# EAGLE board openSX70_XXXXX_8_20190606B (EAGLE 9.3.2)

Size 95.88 x 27.86 mm. Coordinates in mm from the lower left corner, seen from the top.
Outline: 71.72,15.54 71.88,15.53 72.03,15.48 72.17,15.41 72.29,15.31 72.39,15.19 72.46,15.06 72.51,14.91 72.52,14.74
Outline: 72.52,14.74 72.51,14.58 72.46,14.43 72.39,14.3 72.29,14.18
Outline: 72.29,14.18 72.17,14.08 72.03,14.01 71.88,13.96 71.72,13.94
Outline: 71.72,13.94 71.56,13.96 71.41,14.01 71.28,14.08 71.16,14.18
Outline: 71.16,14.18 71.06,14.3 70.99,14.43 70.94,14.58 70.92,14.74
Outline: 70.92,14.74 70.94,14.91 70.99,15.06 71.06,15.19 71.16,15.31 71.28,15.41 71.41,15.48 71.56,15.53 71.72,15.54
Outline: 71.72,15.54 71.57,15.53 71.42,15.48 71.28,15.41 71.16,15.31 71.06,15.19 70.98,15.05 70.94,14.9 70.92,14.74
Outline: 70.92,14.74 70.94,14.59 70.98,14.44 71.06,14.3 71.16,14.18
Outline: 71.16,14.18 71.28,14.08 71.42,14.01 71.57,13.96 71.72,13.94
Outline: 71.72,13.94 71.88,13.96 72.03,14.01 72.17,14.08 72.29,14.18
Outline: 72.29,14.18 72.39,14.3 72.46,14.44 72.51,14.59 72.52,14.74
Outline: 72.52,14.74 72.51,14.9 72.46,15.05 72.39,15.19 72.29,15.31 72.17,15.41 72.03,15.48 71.88,15.53 71.72,15.54
Outline: 91.7,22.11 91.77,22.11 95.88,22.11 95.88,5.64 84.4,5.64 84.15,5.6 83.83,5.47 83.48,5.27 83.11,5.01 82.78,4.68 82.5,4.3 82.31,3.87 82.24,3.4 82.24,2.41 68.47,2.41 68.47,0 4.17,0 4.17,3.6 4.11,3.9 3.94,4.23 3.69,4.56 3.36,4.89 2.98,5.18 2.56,5.42 2.11,5.58 1.66,5.64 0,5.64 0,13.82 2.59,13.84 2.81,13.96 2.98,14.15 3.07,14.39 3.1,14.65 3.07,14.91 2.97,15.15 2.81,15.34 2.59,15.45 0,15.46 0,19.29 2.59,19.29 3.14,19.36 3.6,19.56 3.99,19.87 4.3,20.26 4.53,20.7 4.7,21.17 4.79,21.65 4.82,22.11 4.82,27.07 15.1,27.07 15.1,25.94 25.09,25.95 25.09,27.81 27.43,27.82 31.39,27.82 71.71,27.86 72.52,27.07 89.55,27.07 89.55,24.21 89.61,23.9 89.76,23.56 89.97,23.21 90.25,22.87 90.57,22.57 90.93,22.33 91.31,22.17 91.7,22.11
Outline: 83.76,20.77 83.76,22.06 83.77,22.12 83.79,22.19 83.82,22.24 83.86,22.29 83.91,22.33 83.96,22.36 84.03,22.38 84.09,22.39 84.57,22.39 84.64,22.38 84.7,22.36 84.76,22.33 84.81,22.29 84.85,22.24 84.88,22.19 84.9,22.12 84.9,22.06 84.9,20.77 84.9,20.7 84.88,20.64 84.85,20.58 84.81,20.53 84.76,20.49 84.7,20.46 84.64,20.44 84.57,20.44 84.09,20.44 84.03,20.44 83.96,20.46 83.91,20.49 83.86,20.53 83.82,20.58 83.79,20.64 83.77,20.7 83.76,20.77
Outline: 87.19,20.53 88.48,20.53 88.54,20.52 88.61,20.5 88.66,20.47 88.71,20.43 88.75,20.38 88.78,20.32 88.8,20.26 88.81,20.19 88.81,19.71 88.8,19.65 88.78,19.59 88.75,19.53 88.71,19.48 88.66,19.44 88.61,19.41 88.54,19.39 88.48,19.38 87.19,19.38 87.12,19.39 87.06,19.41 87,19.44 86.95,19.48 86.91,19.53 86.88,19.59 86.86,19.65 86.86,19.71 86.86,20.19 86.86,20.26 86.88,20.32 86.91,20.38 86.95,20.43 87,20.47 87.06,20.5 87.12,20.52 87.19,20.53
Outline: 91.84,20.53 93.13,20.53 93.2,20.52 93.26,20.5 93.32,20.47 93.37,20.43 93.41,20.38 93.44,20.32 93.46,20.26 93.46,20.19 93.46,19.71 93.46,19.65 93.44,19.59 93.41,19.53 93.37,19.48 93.32,19.44 93.26,19.41 93.2,19.39 93.13,19.38 91.84,19.38 91.78,19.39 91.71,19.41 91.66,19.44 91.61,19.48 91.57,19.53 91.54,19.59 91.52,19.65 91.51,19.71 91.51,20.19 91.52,20.26 91.54,20.32 91.57,20.38 91.61,20.43 91.66,20.47 91.71,20.5 91.78,20.52 91.84,20.53
Outline: 78.36,25.71 79.65,25.71 79.71,25.7 79.78,25.68 79.83,25.65 79.88,25.61 79.92,25.56 79.95,25.5 79.97,25.44 79.98,25.37 79.98,24.9 79.97,24.83 79.95,24.77 79.92,24.71 79.88,24.66 79.83,24.62 79.78,24.59 79.71,24.57 79.65,24.56 78.36,24.56 78.29,24.57 78.23,24.59 78.17,24.62 78.12,24.66 78.08,24.71 78.05,24.77 78.03,24.83 78.02,24.9 78.02,25.37 78.03,25.44 78.05,25.5 78.08,25.56 78.12,25.61 78.17,25.65 78.23,25.68 78.29,25.7 78.36,25.71
Outline: 68.87,25.84 70.16,25.84 70.23,25.83 70.29,25.81 70.35,25.78 70.39,25.74 70.44,25.69 70.47,25.63 70.49,25.57 70.49,25.51 70.49,25.03 70.49,24.96 70.47,24.9 70.44,24.84 70.39,24.79 70.35,24.75 70.29,24.72 70.23,24.7 70.16,24.69 68.87,24.69 68.8,24.7 68.74,24.72 68.68,24.75 68.64,24.79 68.59,24.84 68.56,24.9 68.54,24.96 68.54,25.03 68.54,25.51 68.54,25.57 68.56,25.63 68.59,25.69 68.64,25.74 68.68,25.78 68.74,25.81 68.8,25.83 68.87,25.84
Outline: 64.95,25.84 66.24,25.84 66.31,25.83 66.37,25.81 66.43,25.78 66.48,25.74 66.52,25.69 66.55,25.63 66.57,25.57 66.57,25.51 66.57,25.03 66.57,24.96 66.55,24.9 66.52,24.84 66.48,24.79 66.43,24.75 66.37,24.72 66.31,24.7 66.24,24.69 64.95,24.69 64.88,24.7 64.82,24.72 64.77,24.75 64.72,24.79 64.68,24.84 64.65,24.9 64.63,24.96 64.62,25.03 64.62,25.51 64.63,25.57 64.65,25.63 64.68,25.69 64.72,25.74 64.77,25.78 64.82,25.81 64.88,25.83 64.95,25.84
Outline: 31.52,16.35 41.5,22.53 42.01,22.82 42.74,23.03 43.62,23.16 44.59,23.21 45.57,23.18 46.5,23.05 47.32,22.84 47.95,22.53 58.05,16.23 58.41,15.9 58.64,15.51 58.76,15.07 58.78,14.61 58.71,14.16 58.56,13.73 58.34,13.34 58.06,13.03 49.78,7.77 48.71,7.05 47.57,6.51 46.38,6.16 45.13,5.99 43.84,6.03 42.53,6.28 41.2,6.75 39.87,7.45 31.22,12.93 30.83,13.23 30.55,13.62 30.37,14.06 30.32,14.55 30.4,15.04 30.62,15.52 30.99,15.97 31.52,16.35
Outline: 78.39,25.69 79.68,25.69 79.75,25.69 79.81,25.67 79.87,25.64 79.92,25.59 79.96,25.55 79.99,25.49 80.01,25.43 80.02,25.36 80.02,24.88 80.01,24.81 79.99,24.75 79.96,24.7 79.92,24.65 79.87,24.61 79.81,24.58 79.75,24.56 79.68,24.55 78.39,24.55 78.33,24.56 78.27,24.58 78.21,24.61 78.16,24.65 78.12,24.7 78.09,24.75 78.07,24.81 78.06,24.88 78.06,25.36 78.07,25.43 78.09,25.49 78.12,25.55 78.16,25.59 78.21,25.64 78.27,25.67 78.33,25.69 78.39,25.69
Outline: 83.8,20.75 83.8,22.04 83.8,22.11 83.82,22.17 83.85,22.23 83.9,22.28 83.94,22.32 84,22.35 84.06,22.37 84.13,22.38 84.61,22.38 84.68,22.37 84.74,22.35 84.79,22.32 84.84,22.28 84.88,22.23 84.91,22.17 84.93,22.11 84.94,22.04 84.94,20.75 84.93,20.69 84.91,20.62 84.88,20.57 84.84,20.52 84.79,20.48 84.74,20.45 84.68,20.43 84.61,20.42 84.13,20.42 84.06,20.43 84,20.45 83.94,20.48 83.9,20.52 83.85,20.57 83.82,20.62 83.8,20.69 83.8,20.75
Outline: 64.99,25.82 66.28,25.82 66.35,25.82 66.41,25.8 66.46,25.77 66.51,25.73 66.55,25.68 66.58,25.62 66.6,25.56 66.61,25.49 66.61,25.01 66.6,24.95 66.58,24.88 66.55,24.83 66.51,24.78 66.46,24.74 66.41,24.71 66.35,24.69 66.28,24.68 64.99,24.68 64.92,24.69 64.86,24.71 64.8,24.74 64.75,24.78 64.71,24.83 64.68,24.88 64.66,24.95 64.66,25.01 64.66,25.49 64.66,25.56 64.68,25.62 64.71,25.68 64.75,25.73 64.8,25.77 64.86,25.8 64.92,25.82 64.99,25.82
Outline: 68.91,25.82 70.2,25.82 70.26,25.82 70.33,25.8 70.38,25.77 70.43,25.73 70.47,25.68 70.5,25.62 70.52,25.56 70.53,25.49 70.53,25.01 70.52,24.95 70.5,24.88 70.47,24.83 70.43,24.78 70.38,24.74 70.33,24.71 70.26,24.69 70.2,24.68 68.91,24.68 68.84,24.69 68.78,24.71 68.72,24.74 68.67,24.78 68.63,24.83 68.6,24.88 68.58,24.95 68.58,25.01 68.58,25.49 68.58,25.56 68.6,25.62 68.63,25.68 68.67,25.73 68.72,25.77 68.78,25.8 68.84,25.82 68.91,25.82
Outline: 87.23,20.51 88.52,20.51 88.58,20.5 88.64,20.49 88.7,20.45 88.75,20.41 88.79,20.36 88.82,20.31 88.84,20.25 88.85,20.18 88.85,19.7 88.84,19.63 88.82,19.57 88.79,19.51 88.75,19.47 88.7,19.43 88.64,19.39 88.58,19.37 88.52,19.37 87.23,19.37 87.16,19.37 87.1,19.39 87.04,19.43 86.99,19.47 86.95,19.51 86.92,19.57 86.9,19.63 86.89,19.7 86.89,20.18 86.9,20.25 86.92,20.31 86.95,20.36 86.99,20.41 87.04,20.45 87.1,20.49 87.16,20.5 87.23,20.51
Outline: 91.88,20.51 93.17,20.51 93.24,20.5 93.3,20.49 93.36,20.45 93.4,20.41 93.44,20.36 93.48,20.31 93.5,20.25 93.5,20.18 93.5,19.7 93.5,19.63 93.48,19.57 93.44,19.51 93.4,19.47 93.36,19.43 93.3,19.39 93.24,19.37 93.17,19.37 91.88,19.37 91.81,19.37 91.75,19.39 91.69,19.43 91.65,19.47 91.6,19.51 91.57,19.57 91.55,19.63 91.55,19.7 91.55,20.18 91.55,20.25 91.57,20.31 91.6,20.36 91.65,20.41 91.69,20.45 91.75,20.49 91.81,20.5 91.88,20.51
Outline: 89.58,21.32 90.87,21.32 90.94,21.31 91,21.29 91.05,21.26 91.1,21.22 91.14,21.17 91.18,21.12 91.19,21.05 91.2,20.99 91.2,20.51 91.19,20.44 91.18,20.38 91.14,20.32 91.1,20.27 91.05,20.23 91,20.2 90.94,20.18 90.87,20.18 89.58,20.18 89.51,20.18 89.45,20.2 89.39,20.23 89.35,20.27 89.3,20.32 89.27,20.38 89.25,20.44 89.25,20.51 89.25,20.99 89.25,21.05 89.27,21.12 89.3,21.17 89.35,21.22 89.39,21.26 89.45,21.29 89.51,21.31 89.58,21.32
Outline: 31.56,16.33 41.53,22.52 42.05,22.81 42.78,23.02 43.66,23.15 44.62,23.2 45.61,23.16 46.54,23.04 47.36,22.83 47.99,22.52 58.09,16.22 58.45,15.89 58.68,15.49 58.8,15.06 58.82,14.6 58.75,14.14 58.6,13.71 58.38,13.33 58.1,13.01 49.82,7.75 48.75,7.04 47.61,6.5 46.41,6.14 45.17,5.98 43.88,6.02 42.57,6.27 41.24,6.74 39.91,7.43 31.26,12.92 30.87,13.22 30.58,13.6 30.41,14.05 30.36,14.53 30.44,15.03 30.66,15.51 31.03,15.95 31.56,16.33
Copper layers (1*16): Top 0.035mm / dielectric 1.5mm / Bottom 0.035mm
Design rules "default": minimum track width 6mil, minimum drill 0.35mm, track to track 6mil, track to pad 6mil, pad to pad 6mil, via to via 6mil, smd to smd 6mil, copper to edge 40mil, drill to drill 6mil, minimum pad ring 10mil, minimum via ring 8mil, stop-mask expansion 4mil, vias tented up to drill 0mil, thermal gap 10mil
Net classes: 0 default: width 0.254 mm; 1 GND: width 0.61 mm

## Footprints (pad centres in the part's own frame; a part is rotated, then mirrored left to right if it is on the bottom)
C0603 = smd 0.889 x 0.889: 1 0,0.762; 2 0,-0.762
SODFL2512X100N = smd 1.05 x 0.6: A 1.4,0; C -1.4,0
H2X3-2.54 = drill 0.635 pad 1.397 square: 1 -1.27,2.54 | drill 0.635 pad 1.397: 2 -1.27,0; 3 -1.27,-2.54; 4 1.27,-2.54; 5 1.27,0; 6 1.27,2.54
687106183722 = smd 0.3 x 1: 1 -1.25,1.9; 2 -0.75,1.9; 3 -0.25,1.9; 4 0.25,1.9; 5 0.75,1.9; 6 1.25,1.9 | smd 1.65 x 1.3: Z1 -3.525,0; Z2 3.525,0
SOT23-3 = smd 0.8 x 0.9: 1 -0.95,-1; 2 0.95,-1; 3 0,1.1
R0603 = smd 0.889 x 0.889: 1 0,0.762; 2 0,-0.762
SMT-JUMPER_3_1-NC_TRACE_SILK = smd 0.635 x 1.27: 1 -1.016,0; 2 0,0; 3 1.016,0
SX70-S-PAD2 = smd 2.413 x 1.143: P$1 0.01,0.087
SX70-SOLENOID1-2 = smd 1.372 x 2.54: SOL1+ -0.826,0.127; SOL1- 0.953,0.127
SOIC8 = smd 2.2 x 0.6: 1 -2.6,1.905; 2 -2.6,0.635; 3 -2.6,-0.635; 4 -2.6,-1.905; 5 2.6,-1.905; 6 2.6,-0.635; 7 2.6,0.635; 8 2.6,1.905
PAD.03X.04 = smd 1.016 x 1.016: P$1 0,0
MLF32 = smd 0.7 x 0.3: 1 -2.35,1.75; 2 -2.35,1.25; 3 -2.35,0.75; 4 -2.35,0.25; 5 -2.35,-0.25; 6 -2.35,-0.75; 7 -2.35,-1.25; 8 -2.35,-1.75; 17 2.35,-1.75; 18 2.35,-1.25; 19 2.35,-0.75; 20 2.35,-0.25; 21 2.35,0.25; 22 2.35,0.75; 23 2.35,1.25; 24 2.35,1.75 | smd 0.3 x 0.7: 9 -1.75,-2.35; 10 -1.25,-2.35; 11 -0.75,-2.35; 12 -0.25,-2.35; 13 0.25,-2.35; 14 0.75,-2.35; 15 1.25,-2.35; 16 1.75,-2.35; 25 1.75,2.35; 26 1.25,2.35; 27 0.75,2.35; 28 0.25,2.35; 29 -0.25,2.35; 30 -0.75,2.35; 31 -1.25,2.35; 32 -1.75,2.35
SOT127P706X180-6N = smd 0.92 x 1.61: 1 -2.54,-3.005; 2 -1.27,-3.005; 3 0,-3.005; 4 1.27,-3.005; 5 2.54,-3.005 | smd 3.16 x 1.97: 6 0,3.005
SX70-7-PAD-PROPER = smd 1.31 x 2.159: GND 7.875,1.312; MOTOR 6.125,1.312; S3 9.625,1.312; S5 11.375,1.312; S8 0.875,1.312; S9 2.625,1.312; VCC 4.375,1.312
FFA-PAD-PACKAGE = smd 1.95 x 1.95: F+ -3.277,-0.013; F- 2.87,0 | smd 1.05 x 1.95: FF -0.914,0; FT 0.737,0.025
LTST-BILED-15X16 = smd 0.65 x 0.952: P$1 0.425,0.776; P$2 -0.425,0.776; P$3 0.425,-0.776; P$4 -0.425,-0.776
CFP95P160X100-3N = smd 0.3 x 2.032: GND 0.038,0.175; IN -0.912,0.177; OUT 0.992,0.174

## Placement (x,y rotation side)
C1  1uf  [C0603]  -0.28,-18.84 0 top  (outside the outline)
C2  10nf  [C0603]  -5.36,-18.84 0 top  (outside the outline)
C3  100nf  [C0603]  -10.44,-18.84 0 top  (outside the outline)
C4  1uf  [C0603]  25.12,-13.76 0 top  (outside the outline)
C5  100nf  [C0603]  20.04,-13.76 0 top  (outside the outline)
C6  100nf  [C0603]  14.96,-13.76 0 top  (outside the outline)
C7  100nf  [C0603]  9.88,-13.76 0 top  (outside the outline)
C8  100nf  [C0603]  4.8,-13.76 0 top  (outside the outline)
C9  100nf  [C0603]  -0.28,-13.76 0 top  (outside the outline)
D1  1N4148WSF  [SODFL2512X100N]  12.42,-22.65 0 top  (outside the outline)
D2  1N4148WSF  [SODFL2512X100N]  4.8,-22.65 0 top  (outside the outline)
ICSP  ICSP  [H2X3-2.54]  11.15,-37.89 0 top  (outside the outline)
J1  687106183722  [687106183722]  8.61,-58.21 0 top  (outside the outline)
Q1  5.8A/30V/35mΩ  [SOT23-3]  3.53,-37.89 0 top  (outside the outline)
Q2  5.8A/30V/35mΩ  [SOT23-3]  -1.55,-37.89 0 top  (outside the outline)
R1  100R  [R0603]  -7.9,-22.65 0 top  (outside the outline)
R2  100K 1/10W  [R0603]  -6.63,-39.16 0 top  (outside the outline)
R3  100R  [R0603]  25.12,-17.57 0 top  (outside the outline)
R4  100K 1/10W  [R0603]  25.12,-29 0 top  (outside the outline)
R5  15K 1/10W  [R0603]  6.07,-29 0 top  (outside the outline)
R6  10K  [R0603]  20.04,-17.57 0 top  (outside the outline)
R7  100R  [R0603]  14.96,-17.57 0 top  (outside the outline)
R9  15K 1/10W  [R0603]  0.99,-29 0 top  (outside the outline)
R10  10K  [R0603]  9.88,-17.57 0 top  (outside the outline)
R11  1K 1/10W  [R0603]  -4.09,-29 0 top  (outside the outline)
R12  10K  [R0603]  4.8,-17.57 0 top  (outside the outline)
S0  S0  [SMT-JUMPER_3_1-NC_TRACE_SILK]  -0.28,-22.65 0 top  (outside the outline)
S1+  SX70-S-PAD-NEW  [SX70-S-PAD2]  16.23,-9.95 0 top  (outside the outline)
S1-  SX70-S-PAD-NEW  [SX70-S-PAD2]  12.42,-9.95 0 top  (outside the outline)
S2  S2  [SMT-JUMPER_3_1-NC_TRACE_SILK]  -4.09,-22.65 0 top  (outside the outline)
S2+  SX70-S-PAD-NEW  [SX70-S-PAD2]  8.61,-9.95 0 top  (outside the outline)
S2-  SX70-S-PAD-NEW  [SX70-S-PAD2]  4.8,-9.95 0 top  (outside the outline)
SOL1  SX70-SOLENOID1-2PADS  [SX70-SOLENOID1-2]  -5.36,-13.76 0 top  (outside the outline)
SOL2+  SX70-S-PAD-NEW  [SX70-S-PAD2]  0.99,-9.95 0 top  (outside the outline)
SOL2-  SX70-S-PAD-NEW  [SX70-S-PAD2]  -2.82,-9.95 0 top  (outside the outline)
TCS3200  TCS3200D  [SOIC8]  20.04,-36.62 0 top  (outside the outline)
TP1  TEST-POINT3X4  [PAD.03X.04]  -5.36,-9.95 0 top  (outside the outline)
TP2  TEST-POINT3X4  [PAD.03X.04]  -7.9,-9.95 0 top  (outside the outline)
TP3  TEST-POINT3X4  [PAD.03X.04]  -10.44,-9.95 0 top  (outside the outline)
TP4  TEST-POINT3X4  [PAD.03X.04]  26.39,-7.41 0 top  (outside the outline)
U1  ATMEGA328P_32MLFATMEGA328-MLF  [MLF32]  -4.09,-46.78 0 top  (outside the outline)
U2  TPS79501DCQ  [SOT127P706X180-6N]  23.85,-56.94 0 top  (outside the outline)
U$1  SX70-7-PAD  [SX70-7-PAD-PROPER]  9.88,-27.73 0 top  (outside the outline)
U$2  FFA  [FFA-PAD-PACKAGE]  22.58,-9.95 0 top  (outside the outline)
U$4  LTST-C195KGJRKT  [LTST-BILED-15X16]  -9.17,-13.76 0 top  (outside the outline)
Y1  CSTCE8M00G52Z-R0  [CFP95P160X100-3N]  20.04,-22.65 0 top  (outside the outline)

## Library data of the parts
C1 C4 = Seeed-Capacitor; MPN: CC0603KRX5R6BB106
C2 C3 C5-C9 = Seeed-Capacitor; MPN: CC0603KRX7R9BB104
D1 D2 = Common-Parts-Library-Eagle; MANUFACTURER: Fairchild Semiconductor
ICSP S1+ S1- S2+ S2- SOL1 SOL2+ SOL2- U$2 = openSX70
J1 = 687106183722; AVAILABILITY: Good; DESCRIPTION: CONN FFC BTM 6POS 0.5MM SMD R/A; MF: Wurth Electronics; MP: 687106183722; PACKAGE: None; PRICE: 1.21 USD
Q1 Q2 = openSX70; PROD_ID: TRANS-12988
R1 R3 R7 = Seeed-Resistor; MPN: RC0603JR-07100RL
R2 R4 = Seeed-Resistor; MPN: RC0603JR-07100KL
R5 R9 = Seeed-Resistor; MPN: RC0603FR-0715KL
R6 R10 R12 = Seeed-Resistor; MPN: RC0603FR-0710KL
R11 = Seeed-Resistor; MPN: RC0603JR-071KL
S0 S2 = SparkFun-Jumpers
TCS3200 = TCS3200D; AVAILABILITY: Unavailable; DESCRIPTION: TSL3200 Series 5.5 V Programmable Color Light-To-Frequency Converter - SOIC-8; MF: ams; MP: TCS3200D-TR; PACKAGE: SOIC-8 ams; PRICE: None
TP1-TP4 = SparkFun-Connectors
U1 U$1 = _openSX70
U2 = TPS79501DCQ; AVAILABILITY: Unavailable; DESCRIPTION: Ultralow-Noise, High-PSRR, Fast, RF, 500-mA Low-Dropout Linear Regulators 6-SOT-223 -40 to 125; MF: Texas Instruments; MP: TPS79501DCQ; PACKAGE: SOT-223-6 Texas Instruments; PRICE: None
U$4 = LTST-C195KGJRKT; AVAILABILITY: Unavailable; DESCRIPTION: Green/Red 130° Water Clear 35/25 mcd 2 V 0605 Surface Mount Bi-Color LED; MF: Lite-On Inc.; MP: LTST-C195KGJRKT; PACKAGE: 0606 Lite-On; PRICE: None
Y1 = CSTCE16M0V53-R0; AVAILABILITY: Good; DESCRIPTION: Ceramic Resonator 16MHz ??0.5% (Tol) ??0.3% (Stability) 15pF 40Ohm 3-Pin CSMD T/R; MF: Murata; MP: CSTCE16M0V53-R0; PACKAGE: SMD-3 Murata; PRICE: 0.28 USD

## Nets
3.3V: C3.1 C4.2 C5.1 C6.1 C8.1 C9.1 R12.2 S0.3 S2.3 TCS3200.5 TP2.P$1 U1.4 U1.6 U1.18 U2.4 U$2.F+
6V: C1.2 D1.C D2.C ICSP.6 J1.3 SOL1.SOL1+ SOL2+.P$1 TP3.P$1 U2.1 U2.2 U$1.VCC
DTR: C7.1 J1.6
FF: U1.2 U$2.FF
GND: C1.1 C2.1 C3.2 C4.1 C5.2 C6.2 C8.2 C9.2 ICSP.4 J1.1 Q1.2 Q2.2 R2.1 R4.1 R6.2 R10.2 R11.1 S0.1 S1-.P$1 S2-.P$1 S2.1 TCS3200.4 U1.3 U1.5 U1.21 U2.3 U2.6 U$1.GND U$2.F- Y1.GND
LED1: ICSP.2 U1.17 U$4.P$2
LED2: U1.26 U$4.P$1
LM: TCS3200.6 U1.9
MOTOR+: R7.1 U1.25
MOTOR-HEADER: R7.2 U$1.MOTOR
N$1: Q1.1 R1.2 R2.2
N$3: Q2.1 R3.2 R4.2
N$4: U1.7 Y1.IN
N$5: TP1.P$1 U$2.FT
N$6: U1.8 Y1.OUT
N$7: S0.2 TCS3200.1
N$8: S2.2 TCS3200.7
N$10: C2.2 U2.5
N$11: R11.2 U$4.P$3 U$4.P$4
RST: C7.2 ICSP.3 R12.1 U1.29
RXD: J1.4 U1.30
S1: ICSP.1 S1+.P$1 U1.16
S3: U1.12 U$1.S3
S5: U1.11 U$1.S5
S8@2.5V: R9.2 R10.1 U1.24
S8@6V: R9.1 U$1.S8
S9@2.5V: R5.2 R6.1 U1.23
S9@6V: R5.1 U$1.S9
SDA_S2: J1.2 S2+.P$1 U1.27
SOL1: R1.1 U1.1
SOL1-: D1.A Q1.3 SOL1.SOL1-
SOL2: ICSP.5 R3.1 U1.15
SOL2-: D2.A Q2.3 SOL2-.P$1
TCS3200_OE: TCS3200.3 U1.13
TCS3200_S1: TCS3200.2 U1.32
TCS3200_S3: TCS3200.8 U1.10
TXD: J1.5 U1.31

## Tracks (layer width: path | path; a pad name or v marks a point on that pad's centre or on a via)
3.3V  (15 unrouted)
6V  (10 unrouted)
DTR  (1 unrouted)
FF  (1 unrouted)
GND  (29 unrouted)
LED1  (2 unrouted)
LED2  (1 unrouted)
LM  (1 unrouted)
MOTOR+  (1 unrouted)
MOTOR-HEADER  (1 unrouted)
N$1  (2 unrouted)
N$3  (2 unrouted)
N$4  (1 unrouted)
N$5  (1 unrouted)
N$6  (1 unrouted)
N$7  (1 unrouted)
N$8  (1 unrouted)
N$10  (1 unrouted)
N$11  (2 unrouted)
RST  (3 unrouted)
RXD  (1 unrouted)
S1  (2 unrouted)
S3  (1 unrouted)
S5  (1 unrouted)
S8@2.5V  (2 unrouted)
S8@6V  (1 unrouted)
S9@2.5V  (2 unrouted)
S9@6V  (1 unrouted)
SDA_S2  (2 unrouted)
SOL1  (1 unrouted)
SOL1-  (2 unrouted)
SOL2  (2 unrouted)
SOL2-  (2 unrouted)
TCS3200_OE  (1 unrouted)
TCS3200_S1  (1 unrouted)
TCS3200_S3  (1 unrouted)
TXD  (1 unrouted)

## Text on the board
Dimension: CUT OUT | CUT OUT | CUT OUT | CUT OUT | CUT OUT | CUT OUT | CUT OUT | CUT OUT